# Altium PCB Power_Clock_proto.PcbDoc
Units mil, origin at the board's own origin, x right, y up, seen from the top; angles counter-clockwise.
Board outline 5200 x 2700 mil, 2 copper layers (Top Layer, Bottom Layer), stack 61.756 mil thick; 10 components, 6 nets, 37 pads, 0 vias.
Unrouted connection lines stored in the file: 29.
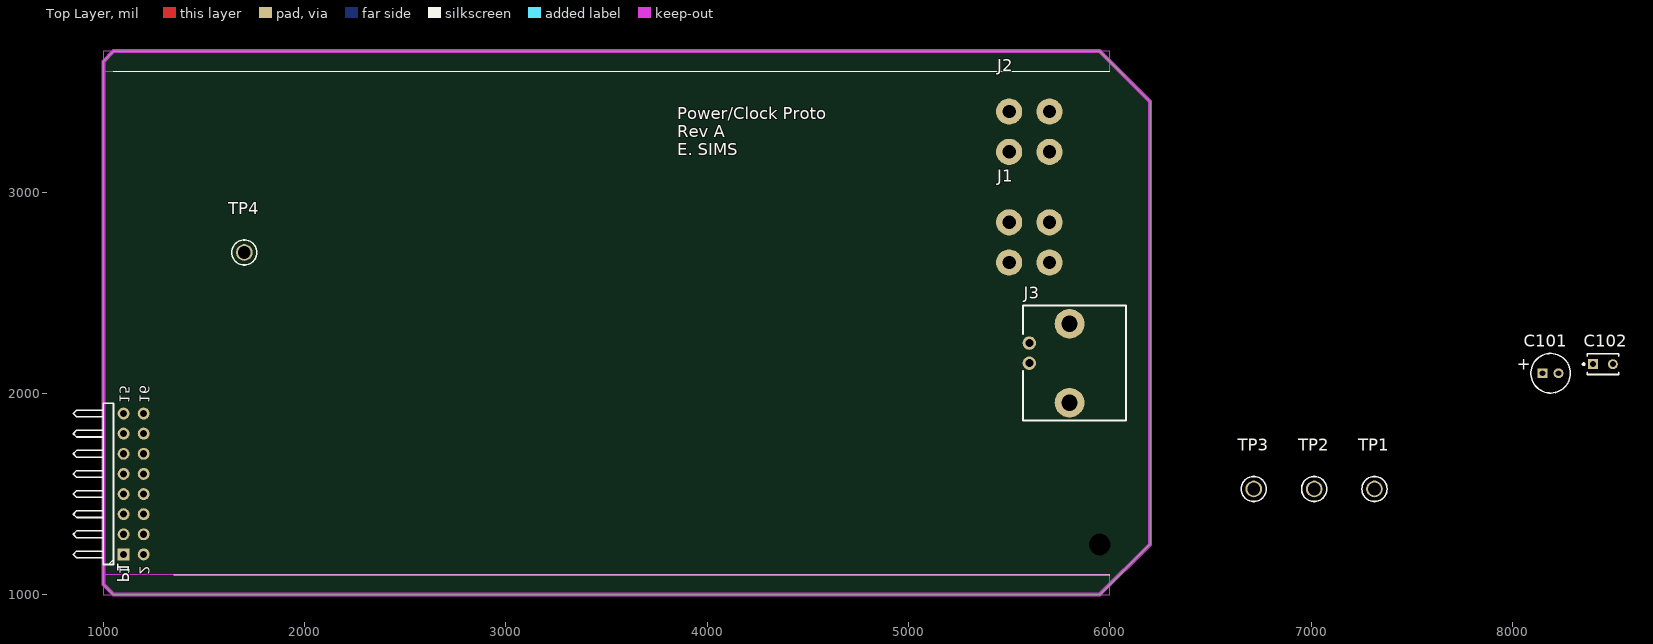
[diagram p0: Top Layer view]
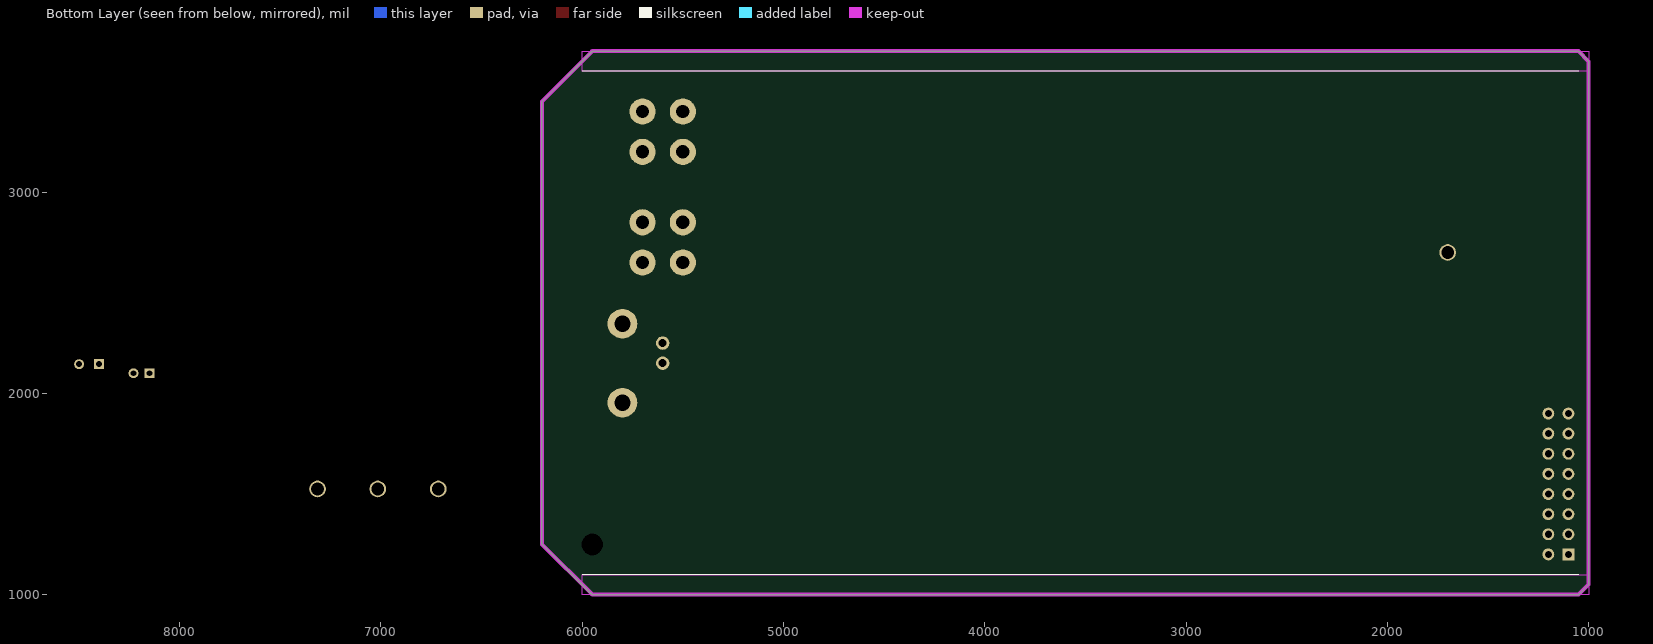
[diagram p1: Bottom Layer view, seen from below]

## Layer stack, top to bottom
Top Solder: solder mask 1, SM-001, Dk 4
Top Layer: signal copper 1.378
Dielectric 1: core 59, Core-043, Dk 4.3
Bottom Layer: signal copper 1.378
Bottom Solder: solder mask 1, SM-001, Dk 4

## Board outline
1000,1050 1050,1000 5950,1000 6200,1250 6200,3450 5950,3700 1050,3700 1000,3650

## Design rules (kind name [scope] priority, off if disabled: settings)
Clearance [All] p1: gap=8 ignorepadtopadclearanceinfootprint=FALSE
Height Height_Bottom [OnBottom] p1: minheight=0 maxheight=120 prefheight=0
Height Height_Top [OnTop] p2: minheight=0 maxheight=630 prefheight=0
HoleSize [All] p1: absolutevalues=TRUE maxlimit=120 minlimit=1 maxpercent=80.000 minpercent=20.000
PolygonConnect [All] p1: connectstyle=Relief reliefconductorwidth=10 reliefentries=4 polygonreliefangle="90 Angle" airgapwidth=10
RoutingVias "Schematic Routing Via Style_1" [InNetClass('PWR')] p1: holewidth=20 width=35 viastyle="Through Hole" minholewidth=20 minwidth=35 maxholewidth=20 maxwidth=50
RoutingVias [All] p2: holewidth=10 width=20 viastyle="Through Hole" minholewidth=10 minwidth=20 maxholewidth=10 maxwidth=20
SilkToSilkClearance [All] p1: silktosilkclearance=5
SolderMaskExpansion [All] p1: expansion=4 istentingtop=FALSE
Width "Schematic Width Constraint_1" [InNetClass('PWR')] p1: maxlimit=50 minlimit=20 preferedwidth=20
Width [All] p2: maxlimit=8 minlimit=8 preferedwidth=8
27 further rules are at their usual default settings.

## Classes and differential pairs
net class PWR: GND VCC

## Components (designator, comment, footprint, x,y, rotation, side; value= is the part's Value field where it differs from the comment)
C101 "Cap Pol5" C5x7 8190,2100 r0 top value=10uF
C102 "K104K15X7RF5TL2" VISH-K104K15X7RF5TL2 8450,2145 r0 top
J1 "VCC" CT3151SP-2 5600,2750 r270 top
J2 "GND" CT3151SP-0 5600,3300 r270 top
J3 "RF" "BNC R/A" 5800,2150 r90 top
P1 "Header 8X2H" HDR2X8H 1100,1200 r90 top
TP1 "GND" KSTN-5011_V 7315,1525 r0 top
TP2 "VCC" KSTN-5011_V 7015,1525 r0 top
TP3 "CLK" KSTN-5011_V 6715,1525 r0 top
TP4 "RST#" KSTN-5011_V 1700,2700 r0 top

## Footprints (in the part's own frame and the unit in brackets; to place one, negate y for a bottom-side part, rotate by r counter-clockwise, add the part's x,y. Pads: shape width x height; smd on the part's side, far side on the other; paste and mask are expansions set on the pad)
"BNC R/A" [mm]
  round 1.7 hole 1: 1(0,5.08) 2(2.54,5.08)
  round 3.75 hole 2.05: MNT(-4.98,0) MNT(4.98,0)
  silkscreen extent -7.25,-7.09 7.25,5.89, body extent -7.25,-28.6 7.25,5.89, height 11.5
C5x7 [mm] "Capacitor; 2 Leads"
  rect 1.25x1.25 hole 0.75: 1(-1,0)
  round 1.25 hole 0.75: 2(1,0)
  silkscreen extent -2.5,-2.5 2.5,2.5, body extent -2.5,-2.5 2.5,2.5, height 7
CT3151SP-0 [mil]
  round 130 hole 66: 1(-100,100) 1(-100,-100) 1(100,100) 1(100,-100)
  body extent -266,-128 266,962, height 566
CT3151SP-2 [mil]
  round 130 hole 66: 1(-100,100) 1(-100,-100) 1(100,100) 1(100,-100)
  body extent -266,-128 266,962, height 566
HDR2X8H [mm] "Connector; Header; 8x2 Position; Right Angle"
  rect 1.5x1.5 hole 0.9: 1(0,0)
  round 1.5 hole 0.9: 2(0,-2.54) 3(2.54,0) 4(2.54,-2.54) 5(5.08,0) 6(5.08,-2.54) 7(7.62,0) 8(7.62,-2.54) 9(10.16,0) 10(10.16,-2.54) 11(12.7,0) 12(12.7,-2.54) 13(15.24,0) 14(15.24,-2.54) 15(17.78,0) 16(17.78,-2.54)
  silkscreen extent -1.27,1.27 19.05,6.35
KSTN-5011_V [mm] "Test Point, Dia 3.17mm"
  round 2.1 hole 1.6: 1(0,0)
  silkscreen extent -1.59,-1.58 1.59,1.58, body extent -1.59,-1.59 1.59,1.59, height 8.13
VISH-K104K15X7RF5TL2 [mm] "THD, 2-Leads, Body 4x2.6mm"
  rect 1.25x1.25 hole 0.75: 1(-1.25,0)
  round 1.25 hole 0.75: 2(1.25,0)
  silkscreen extent -2.55,-1.3 2,1.3, body extent -2,-1.3 2,1.3, height 5.6

## Part data
C101: "Polarized Capacitor", LatestRevisionDate=17-Jul-2002, LatestRevisionNote="Re-released for DXP Platform.", PackageDescription="Polarized Capacitor; 2 Leads", PackageReference=POLAR0.8, Published=8-Jun-2000, Publisher="Altium Limited"
C102: library part CMP-2000-06508-1, "Ceramic Capacitor, 100 nF, +/- 10%, 50 V, -55 to 125 degC, 2-Pin THD, RoHS, Tape and Reel", Capacitance=0.1µF, Manufacturer=Vishay, Operating Temperature=-55°C~125°C, Package / Case=Radial, Package Description="2-Pin Through Hole Device, Body 4 x 2.6 mm", Ratings=-, Standard Package=1, Temperature Coefficient=X7R, Tolerance=±10%, Voltage - Rated=50V, Applications=GeneralPurpose, Catalog Drawings=Mono-KapSide2-15_5.58Mono-KapSide1_15, Category=Capacitors, Datasheet URL=http://www.vishay.com/docs/45171/kseries.pdf, Datasheet Version=08/2013, Family=CeramicCapacitors, Features=-, Height - Seated (Max)="0.220\"(5.58mm)", Lead Spacing="0.098\"(2.50mm)", Lead Style=Straight, Manufacturer URL=http://www.vishay.com/, Mounting Technology=ThroughHole, Mounting Type=ThroughHole, Online Catalog=Mono-Kap™Series, Other Names=BC1084CT, Package Reference=K104K15X7RF5TL2, Packaging=CutTape(CT), Series=Mono-Kap™K, Size / Dimension="0.157\"Lx0.098\"W(4.00mmx2.50mm)", Thickness (Max)=-
J1: library part CT3151SP-2, "CONN BANANA JACK SOLDER RED", Unit Price (USD)=2.05
J2: library part CT3151SP-0, "CONN BANANA JACK SOLDER BLACK", Unit Price (USD)=2.05
P1: "Header, 8-Pin, Dual row, Right Angle", LatestRevisionDate=17-Jul-2002, LatestRevisionNote="Re-released for DXP Platform.", Publisher="Altium Limited", System=Connector
TP1 TP2 TP3 TP4: library part TP

## Free pads (board coordinates)
  round 0 hole 109: ""(5950,1250)

## Nets (pads, with @x,y where several pads share a name; then routed paths per layer and width w, separated by ;. In a path a pad name is that pad's centre, name@x,y a point inside that pad or via, vN(x,y) a via of type N, cw(c..) or ccw(c..) an arc to the next point about the centre after c; other vN are vias at no path point)
CLK: P1.14 TP3.1
DBG: P1.15
GND: C101.2 C102.2 J2.1 J3.2 J3.MNT P1.7 P1.8 P1.9 P1.10 P1.11 P1.12 TP1.1
HT#: P1.13
RST#: P1.16 TP4.1
VCC: C101.1 C102.1 J1.1 P1.1 P1.2 P1.3 P1.4 P1.5 P1.6 TP2.1
pads on no net: J3.1

## Keep-outs
Top Layer:
  rectangle: 1000,3600 6000,3700
  rectangle: 1000,1000 6000,1100
Bottom Layer:
  rectangle: 1000,1000 6000,1100
  rectangle: 1000,3600 6000,3700
Keep-Out Layer:
  the board outline again, w20

## Silkscreen, mask and mechanical layers (free items; w line width, h text height)
Top Overlay:
  lines w5: 1050,3600 6000,3600 ; 1350,1100 6000,1100
  text "Power/Clock Proto / Rev A / E. SIMS" at 3850,3182.09 h60
Bottom Overlay:
  lines w5: 1050,1100 6000,1100 ; 1050,3600 6000,3600

## Text inside footprints (layer, text, board x,y; h text height)
C101: Top Overlay "+" at 8091.57,2168.89 h59.06 r180
P1: Top Overlay "2" at 1180,1100 h50 r270; Top Overlay "1" at 1080,1100 h50 r270; Top Overlay "15" at 1080,1950.74 h50 r270; Top Overlay "16" at 1180,1951.65 h50 r270